# EAGLE board ArnavP_task_two (EAGLE 7.6.0)

Size 56.82 x 53.33 mm. Coordinates in mm from the lower left corner, seen from the top.
Outline: 0,0 56.82,0 56.82,53.33 0,53.33 0,0
Copper layers (1*16): Top 0.035mm / dielectric 1.5mm / Bottom 0.035mm
Design rules "default": minimum track width 10mil, minimum drill 24mil, track to track 8mil, track to pad 8mil, pad to pad 8mil, via to via 8mil, smd to smd 8mil, copper to edge 40mil, drill to drill 8mil, minimum pad ring 10mil, minimum via ring 8mil, stop-mask expansion 4mil, vias tented up to drill 0mil, thermal gap 10mil

## Footprints (pad centres in the part's own frame; a part is rotated, then mirrored left to right if it is on the bottom)
LED5MM = drill 0.813 octagon: A -1.27,0; K 1.27,0
DC-POWER = drill 0.889 pad 2.54 octagon: + 0,2.54; - 0,-2.54
2P-2.54-65/35MIL = drill 0.889 pad 1.651 square: 1 0,1.27 | drill 0.889 pad 1.651: 2 0,-1.27
0207/10 = drill 0.813 octagon: 1 -5.08,0; 2 5.08,0
DIL14 = drill 0.813 long: 1 -7.62,-3.81; 2 -5.08,-3.81; 3 -2.54,-3.81; 4 0,-3.81; 5 2.54,-3.81; 6 5.08,-3.81; 7 7.62,-3.81; 8 7.62,3.81; 9 5.08,3.81; 10 2.54,3.81; 11 0,3.81; 12 -2.54,3.81; 13 -5.08,3.81; 14 -7.62,3.81

## Placement (x,y rotation side)
D1  [LED5MM]  5,22.78 0 top
D2  [LED5MM]  5,35.48 0 top
D3  [LED5MM]  5,48.18 0 top
D4  [LED5MM]  5,60.88 0 top  (outside the outline)
D5  [LED5MM]  5,149.78 0 top  (outside the outline)
FUNC1  [DC-POWER]  5,73.58 0 top  (outside the outline)
P1  5V  [2P-2.54-65/35MIL]  5,86.28 0 top  (outside the outline)
R1  0.25k‎Ω  [0207/10]  5,162.48 0 top  (outside the outline)
R2  250‎Ω  [0207/10]  5,98.98 0 top  (outside the outline)
R3  250‎Ω  [0207/10]  5,111.68 0 top  (outside the outline)
R4  250‎Ω  [0207/10]  5,124.38 0 top  (outside the outline)
R5  250‎Ω  [0207/10]  5,137.08 0 top  (outside the outline)
U1  [DIL14]  5,10.08 0 top

## Library data of the parts
D1-D5 FUNC1 P1 R1-R5 U1 = AUTODESK_CIRCUITS_BREADBOARD

## Nets
N$1: FUNC1.+ U1.14
N$2: D1.K D2.K D3.K D4.K D5.K FUNC1.- P1.1 U1.2 U1.3 U1.10
N$3: D4.A R1.1 R2.2
N$4: R3.1 U1.9
N$5: D3.A R3.2
N$6: D2.A R4.2
N$7: R5.1 U1.11
N$8: D1.A R5.2
N$9: R4.1 U1.8
N$10: P1.2 U1.5
N$11: R2.1 U1.1 U1.12
N$12: D5.A R1.2

## Tracks (layer width: path | path; a pad name or v marks a point on that pad's centre or on a via)
N$1  (1 unrouted)
N$2  (9 unrouted)
N$3  (2 unrouted)
N$4  (1 unrouted)
N$5  (1 unrouted)
N$6  (1 unrouted)
N$7  (1 unrouted)
N$8  (1 unrouted)
N$9  (1 unrouted)
N$10  (1 unrouted)
N$11  (2 unrouted)
N$12  (1 unrouted)